# EAGLE board BSPD3 (EAGLE 6.5.1)
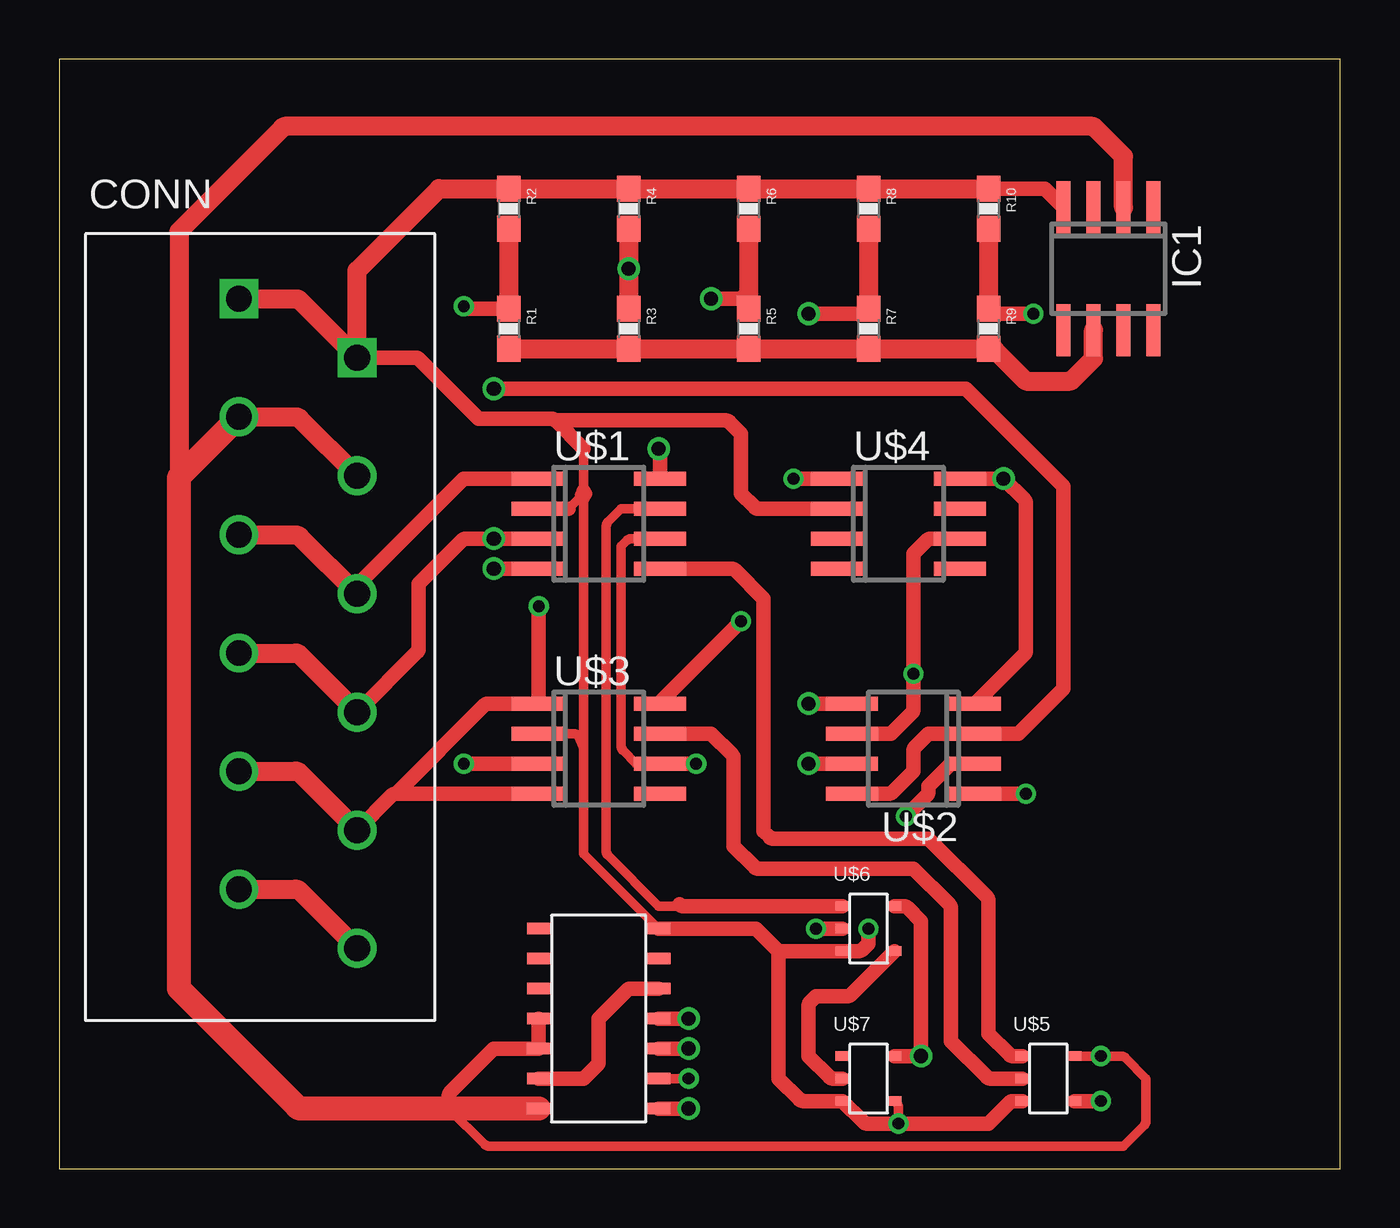
[diagram p0: board, top side]
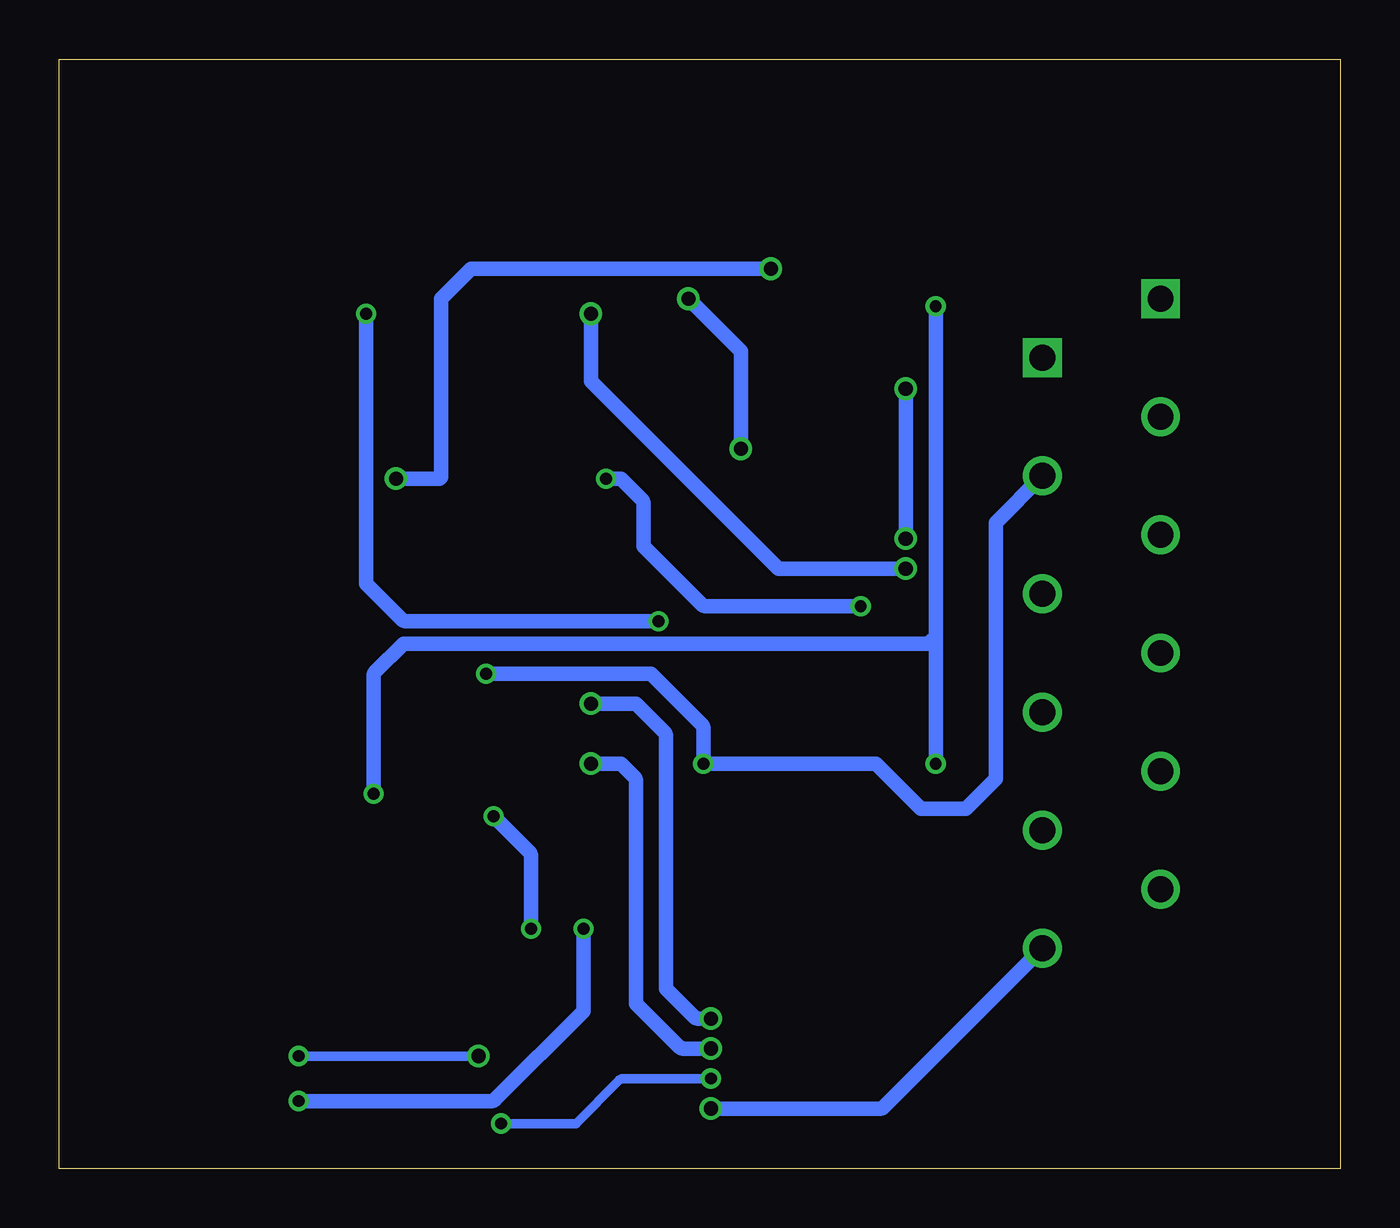
[diagram p1: board, bottom side, seen from below]

Size 54.28 x 46.98 mm. Coordinates in mm from the lower left corner, seen from the top.
Outline: 0,0 54.28,0 54.28,46.98 0,46.98 0,0
Copper layers (1*16): Top 0.0356mm / dielectric 1.5011mm / Bottom 0.0356mm
Design rules "OshPark DRC": minimum track width 6mil, minimum drill 13mil, track to track 6mil, track to pad 6mil, pad to pad 6mil, via to via 6mil, smd to smd 6mil, copper to edge 15mil, drill to drill 6mil, minimum pad ring 7mil, minimum via ring 7mil, stop-mask expansion 3mil, vias tented up to drill 0mil, thermal gap 10mil

## Footprints (pad centres in the part's own frame; a part is rotated, then mirrored left to right if it is on the bottom)
CONNECTOR_6 = drill 1.1 square: 1 0,0; 2 2.5,5 | drill 1.1: 3 5,0; 4 7.5,5; 5 10,0; 6 12.5,5; 7 15,0; 8 17.5,5; 9 20,0; 10 22.5,5; 11 25,0; 12 27.5,5
SOIC8 = smd 0.6 x 2.2: 1 -1.905,-2.6; 2 -0.635,-2.6; 3 0.635,-2.6; 4 1.905,-2.6; 5 1.905,2.6; 6 0.635,2.6; 7 -0.635,2.6; 8 -1.905,2.6
0603-RES = smd 1.1 x 1: 1 -0.85,0; 2 0.85,0
SSOP5-P-0.95 = smd 0.6 x 0.4: P$1 -1.1,0.95; P$2 -1.1,0; P$3 -1.1,-0.95; P$4 1.1,-0.95; P$5 1.1,0.95
NXP_14_SOIC = smd 0.49 x 1: P$1 -3.81,-2.54; P$2 -2.54,-2.54; P$3 -1.27,-2.54; P$4 0,-2.54; P$5 1.27,-2.54; P$6 2.54,-2.54; P$7 3.81,-2.54; P$8 3.81,2.54; P$9 2.54,2.54; P$10 1.27,2.54; P$11 0,2.54; P$12 -1.27,2.54; P$13 -2.54,2.54; P$14 -3.81,2.54

## Placement (x,y rotation side)
CONN  CONN_6  [CONNECTOR_6]  7.62,36.83 270 top
IC1  LT1236S-5  [SOIC8]  44.45,38.1 180 top
R1  1k  [0603-RES]  19.05,35.56 270 top
R2  9.1k  [0603-RES]  19.05,40.64 270 top
R3  9.1k  [0603-RES]  24.13,35.56 270 top
R4  1k  [0603-RES]  24.13,40.64 270 top
R5  3.3k  [0603-RES]  29.21,35.56 270 top
R6  4.7k  [0603-RES]  29.21,40.64 270 top
R7  8.2k  [0603-RES]  34.29,35.56 270 top
R8  2.2k  [0603-RES]  34.29,40.64 270 top
R9  8.87k  [0603-RES]  39.37,35.56 270 top
R10  1.8k  [0603-RES]  39.37,40.64 270 top
U$1  LT1018  [SOIC8]  22.86,27.3 270 top
U$2  LT1018  [SOIC8]  36.2,17.78 90 top
U$3  LT1018  [SOIC8]  22.86,17.78 270 top
U$4  LT1018  [SOIC8]  35.56,27.3 270 top
U$5  TC4S71FT5LFT-OR_GATE  [SSOP5-P-0.95]  41.91,3.81 0 top
U$6  TC4S81FT5LFT-AND_GATE  [SSOP5-P-0.95]  34.29,10.16 0 top
U$7  TC4S69F(TE85L,F)  [SSOP5-P-0.95]  34.29,3.81 0 top
U$8  HEF4082BT,653  [NXP_14_SOIC]  22.86,6.35 90 top

## Library data of the parts
CONN U$5-U$8 = formula electric
IC1 = linear-technology; OC_FARNELL: unknown; OC_NEWARK: unknown
R1-R10 = SparkFun-Resistors
U$1-U$4 = linear-technology

## Nets
1.06V: R7.1 R8.2 U$1.4
2.95V: R5.1 R6.2 U$1.8
4.5V: R1.1 R2.2 U$2.1 U$3.3
12V: CONN.3 CONN.4 IC1.2 U$1.6 U$2.6 U$3.6 U$4.6 U$5.P$5 U$6.P$5 U$7.P$5 U$8.P$11 U$8.P$12 U$8.P$14
.5V: R3.1 R4.2 U$2.4 U$4.8
.831V: R9.1 R10.2 U$3.8
ALL_OK: CONN.11 CONN.12 U$8.P$1
BF: CONN.7 CONN.8 U$1.3 U$2.3 U$2.8
BR: CONN.9 CONN.10 U$3.1 U$3.4 U$4.1
CURRENT: CONN.5 CONN.6 U$1.1
GND: CONN.1 CONN.2 IC1.4 R2.1 R4.1 R6.1 R8.1 R10.1 U$1.2 U$2.2 U$3.2 U$4.2 U$5.P$3 U$6.P$3 U$7.P$3 U$8.P$7
N$1: IC1.6 R1.2 R3.2 R5.2 R7.2 R9.2
N$2: U$1.5 U$5.P$1
N$3: U$3.7 U$5.P$2
N$4: U$5.P$4 U$6.P$2
N$5: U$1.7 U$6.P$1
N$6: U$6.P$4 U$7.P$2
N$7: U$7.P$4 U$8.P$2
N$8: U$2.7 U$8.P$3
N$9: U$2.5 U$8.P$4
N$10: U$8.P$5 U$8.P$13
N$11: U$3.5
N$12: U$4.7

## Tracks (layer width: path | path; a pad name or v marks a point on that pad's centre or on a via)
1.06V  (via drill 0.6)
  Top 0.61: U$1.4 v18.41,25.4 | v31.75,36.2 34.08,36.2 R7.1
  Top 0.813: R8.2 R7.1
  Bottom 0.61: v18.41,25.4 23.81,25.4 31.75,33.34 v31.75,36.2
2.95V  (via drill 0.6)
  Top 0.61: U$1.8 25.46,30.42 v25.4,30.48 | v27.62,36.83 28.89,36.83 29.21,37.15
  Top 0.813: R6.2 29.21,37.15 R5.1
  Bottom 0.61: v25.4,30.48 25.4,34.61 v27.62,36.83
4.5V  (via drill 0.5)
  Top 0.61: R1.1 17.35,36.41 arc-45 17.17,36.48 v17.14,36.51 | v17.14,17.14 U$3.3 | U$2.1 v40.96,15.88
  Top 0.813: R2.2 R1.1
  Bottom 0.61: v17.14,36.51 17.14,22.54 | 17.14,22.54 v17.14,17.14 | v40.96,15.88 40.96,20.85 arc45 40.88,21.03 39.69,22.23 17.57,22.23 arc-45 17.39,22.3 17.14,22.54
12V  (via drill 0.5, 0.6)
  Top 0.406: U$5.P$5 arc-45 U$5.P$5 v44.13,4.76 44.98,4.76 arc-45 45.16,4.69 46.04,3.81 46.04,2.01 arc-45 45.96,1.83 45.09,0.95 18.2,0.95 arc-45 18.02,1.03 16.51,2.54 | U$1.6 24.23,26.67 arc45 24.06,26.6 23.81,26.35 23.81,17.89 arc45 23.89,17.71 24.45,17.14 U$3.6
  Top 0.61: 16.51,2.54 16.51,3.07 arc-45 16.58,3.25 18.41,5.08 U$8.P$12 U$8.P$11 | U$6.P$5 35.77,11.11 arc-45 35.95,11.04 36.51,10.48 v36.51,4.76 U$7.P$5 | U$4.6 36.94,26.67 arc45 36.76,26.6 36.2,26.04 v36.2,20.95 36.2,19.47 arc-45 36.12,19.29 35.24,18.41 U$2.6 | U$3.6 v26.99,17.14
  Top 0.813: CONN.3 10.02,31.83 arc-45 10.19,31.76 CONN.4 | IC1.2 45.09,42.86 43.89,44.06 arc45 43.71,44.13 9.63,44.13 arc45 9.45,44.06 5.08,39.69 5.08,28.57
  Top 1.016: U$8.P$14 16.51,2.54 10.27,2.54 arc-45 10.09,2.61 5.08,7.62 5.08,28.57 5.08,29.18 arc-45 5.15,29.36 CONN.3
  Bottom 0.406: v36.51,4.76 v44.13,4.76
  Bottom 0.61: v36.2,20.95 29.21,20.95 27.06,18.81 arc45 26.99,18.63 v26.99,17.14 19.68,17.14 17.78,15.24 15.88,15.24 14.61,16.51 14.61,27.34 CONN.4
.5V  (via drill 0.6)
  Top 0.61: U$2.4 40.88,21.77 arc45 40.96,21.95 40.96,28.15 arc45 40.88,28.33 v40.01,29.21 39.69,29.21 U$4.8
  Top 0.813: R4.2 v24.13,38.1 R3.1
  Bottom 0.61: v24.13,38.1 36.83,38.1 38.1,36.83 38.1,29.27 U$4.8 v40.01,29.21
.831V  (via drill 0.5)
  Top 0.61: 39.37,36.51 39.61,36.27 arc45 39.79,36.2 v41.27,36.2 | v28.89,23.18 25.5,19.79 arc45 U$3.8
  Top 0.813: R10.2 39.37,36.51 R9.1
  Bottom 0.61: v41.27,36.2 41.27,24.77 39.76,23.25 arc-45 39.58,23.18 v28.89,23.18
ALL_OK  (via drill 0.6)
  Top 0.61: v26.67,2.54 U$8.P$1
  Top 0.813: CONN.11 10.02,11.83 arc-45 10.19,11.76 CONN.12
  Bottom 0.61: CONN.12 19.34,2.61 arc45 19.52,2.54 v26.67,2.54
BF  (via drill 0.6)
  Top 0.61: CONN.8 15.17,21.88 arc45 15.24,22.05 15.24,24.77 17.07,26.6 arc-45 17.25,26.67 v18.41,26.67 U$1.3 | U$2.8 35.14,15.88 arc45 35.32,15.95 36.2,16.83 36.2,17.68 arc-45 36.27,17.85 36.83,18.41 U$2.3 40.64,18.41 42.55,20.32 42.55,28.89 38.42,33.02 v18.41,33.02
  Top 0.813: CONN.7 10.02,21.83 arc-45 10.19,21.76 CONN.8
  Bottom 0.61: v18.41,33.02 v18.41,26.67
BR  (via drill 0.5)
  Top 0.61: CONN.10 14.09,15.8 arc-45 14.27,15.88 | 14.27,15.88 U$3.4 | 14.27,15.88 18.01,19.61 arc-45 18.18,19.68 U$3.1 arc45 20.32,19.83 v20.32,23.81 | v31.11,29.21 U$4.1
  Top 0.813: CONN.9 10.02,16.83 arc-45 10.19,16.76 CONN.10
  Bottom 0.61: v20.32,23.81 26.88,23.81 arc45 27.06,23.89 29.53,26.35 29.53,28.15 arc-45 29.6,28.33 30.48,29.21 v31.11,29.21
CURRENT
  Top 0.61: CONN.6 12.62,24.58 arc-45 12.69,24.76 17.14,29.21 U$1.1
  Top 0.813: CONN.5 10.02,26.83 arc-45 10.19,26.76 CONN.6
GND  (via drill 0.5)
  Top 0.406: 22.23,30.48 22.23,28.68 | 22.15,28.5 21.59,27.94 | U$8.P$7 22.23,13.34 22.23,17.78 | 22.23,17.78 21.98,18.34 arc45 21.8,18.41 U$3.2 | 22.29,28.57 arc-90 22.23,28.32 22.23,17.78
  Top 0.61: CONN.2 15.1,34.33 arc-45 15.27,34.26 17.78,31.75 20.85,31.75 arc-45 21.03,31.68 | 21.03,31.68 22.23,30.48 | 22.15,28.5 arc45 22.23,28.68 22.23,28.57 22.29,28.57 | 21.59,27.94 U$1.2 | 30.48,9.21 U$6.P$3 33.87,9.21 arc45 34.05,9.28 34.29,9.53 v34.29,10.16 | 30.48,9.21 30.48,3.81 31.36,2.93 arc45 31.54,2.86 U$7.P$3 34.07,1.98 arc45 34.25,1.91 39.37,1.91 40.25,2.79 arc-45 40.43,2.86 U$5.P$3 | U$2.2 37.89,17.14 arc45 37.71,17.07 36.83,16.19 36.83,15.98 arc-45 36.76,15.8 v35.88,14.92 | U$4.2 29.63,27.94 arc-45 29.45,28.01 28.89,28.57 28.89,31.11 28.41,31.6 arc45 28.23,31.68 21.03,31.68 | 30.48,9.21 29.53,10.16 U$8.P$7 | R10.1 41.76,41.49 IC1.4
  Top 0.813: CONN.1 10.12,36.83 CONN.2 12.62,38.02 16.09,41.49 R2.1 R4.1 R6.1 R8.1 R10.1
  Bottom 0.61: v35.88,14.92 34.36,13.41 arc45 34.29,13.23 v34.29,10.16
N$1
  Top 0.813: R1.2 R3.2 R5.2 R7.2 R9.2 39.48,34.71 arc-45 39.66,34.64 40.96,33.34 42.76,33.34 arc45 42.94,33.41 43.81,34.29 IC1.6
N$2
  Top 0.61: U$5.P$1 40.43,4.76 arc-45 40.25,4.83 39.37,5.71 39.37,11.32 arc45 39.3,11.5 36.83,13.97 30.27,13.97 arc-45 30.09,14.04 29.84,14.29 29.84,24.13 28.65,25.33 arc45 28.47,25.4 U$1.5
N$3
  Top 0.61: U$5.P$2 39.48,3.81 arc-45 39.3,3.88 37.78,5.4 37.78,11.01 arc45 37.71,11.19 36.2,12.7 29.63,12.7 arc-45 29.45,12.77 28.57,13.65 28.57,17.36 arc45 28.5,17.54 27.62,18.41 U$3.7
N$4  (via drill 0.5)
  Top 0.61: U$5.P$4 v44.13,2.86 arc-45 v44.13,2.86 | v32.07,10.16 U$6.P$2
  Bottom 0.61: v44.13,2.86 35.98,2.86 arc-45 35.8,2.93 32.07,6.67 v32.07,10.16
N$5
  Top 0.406: 26.28,11.18 arc-45 26.11,11.11 25.4,11.11 23.25,13.26 arc-45 23.18,13.44 23.18,27.2 arc-45 23.25,27.38 23.81,27.94 U$1.7
  Top 0.61: U$6.P$1 26.46,11.11 arc-45 26.28,11.18
N$6
  Top 0.61: U$7.P$2 32.81,3.81 arc-45 32.63,3.88 31.75,4.76 31.75,6.88 arc-45 31.82,7.06 32.07,7.3 33.38,7.3 arc45 33.56,7.38 U$6.P$4
N$7  (via drill 0.5)
  Top 0.406: U$8.P$2 v26.67,3.81 | v35.56,1.91 35.56,2.58 arc45 35.49,2.76 U$7.P$4
  Bottom 0.406: v26.67,3.81 30.38,3.81 arc-45 30.55,3.74 32.38,1.91 v35.56,1.91
N$8  (via drill 0.6)
  Top 0.61: U$8.P$3 v26.67,5.08 | v31.75,17.14 U$2.7
  Bottom 0.61: v26.67,5.08 27.84,5.08 arc45 28.01,5.15 29.84,6.99 29.84,16.41 arc-45 29.92,16.58 30.48,17.14 v31.75,17.14
N$9  (via drill 0.6)
  Top 0.61: U$8.P$4 v26.67,6.35 | v31.75,19.68 U$2.5
  Bottom 0.61: v26.67,6.35 27.2,6.35 arc45 27.38,6.42 28.57,7.62 28.57,18.31 arc-45 28.65,18.49 29.84,19.68 v31.75,19.68
N$10
  Top 0.61: U$8.P$13 22.23,3.81 22.79,4.37 arc45 22.86,4.55 22.86,6.35 24.06,7.55 arc-45 24.23,7.62 U$8.P$5